# Altium PCB PCB1.PcbDoc
Units mil, origin at the board's own origin, x right, y up, seen from the top; angles counter-clockwise.
Board outline 1970 x 3543.31 mil, 2 copper layers (Top Layer, Bottom Layer); 72 components, 43 nets, 232 pads, 155 vias.
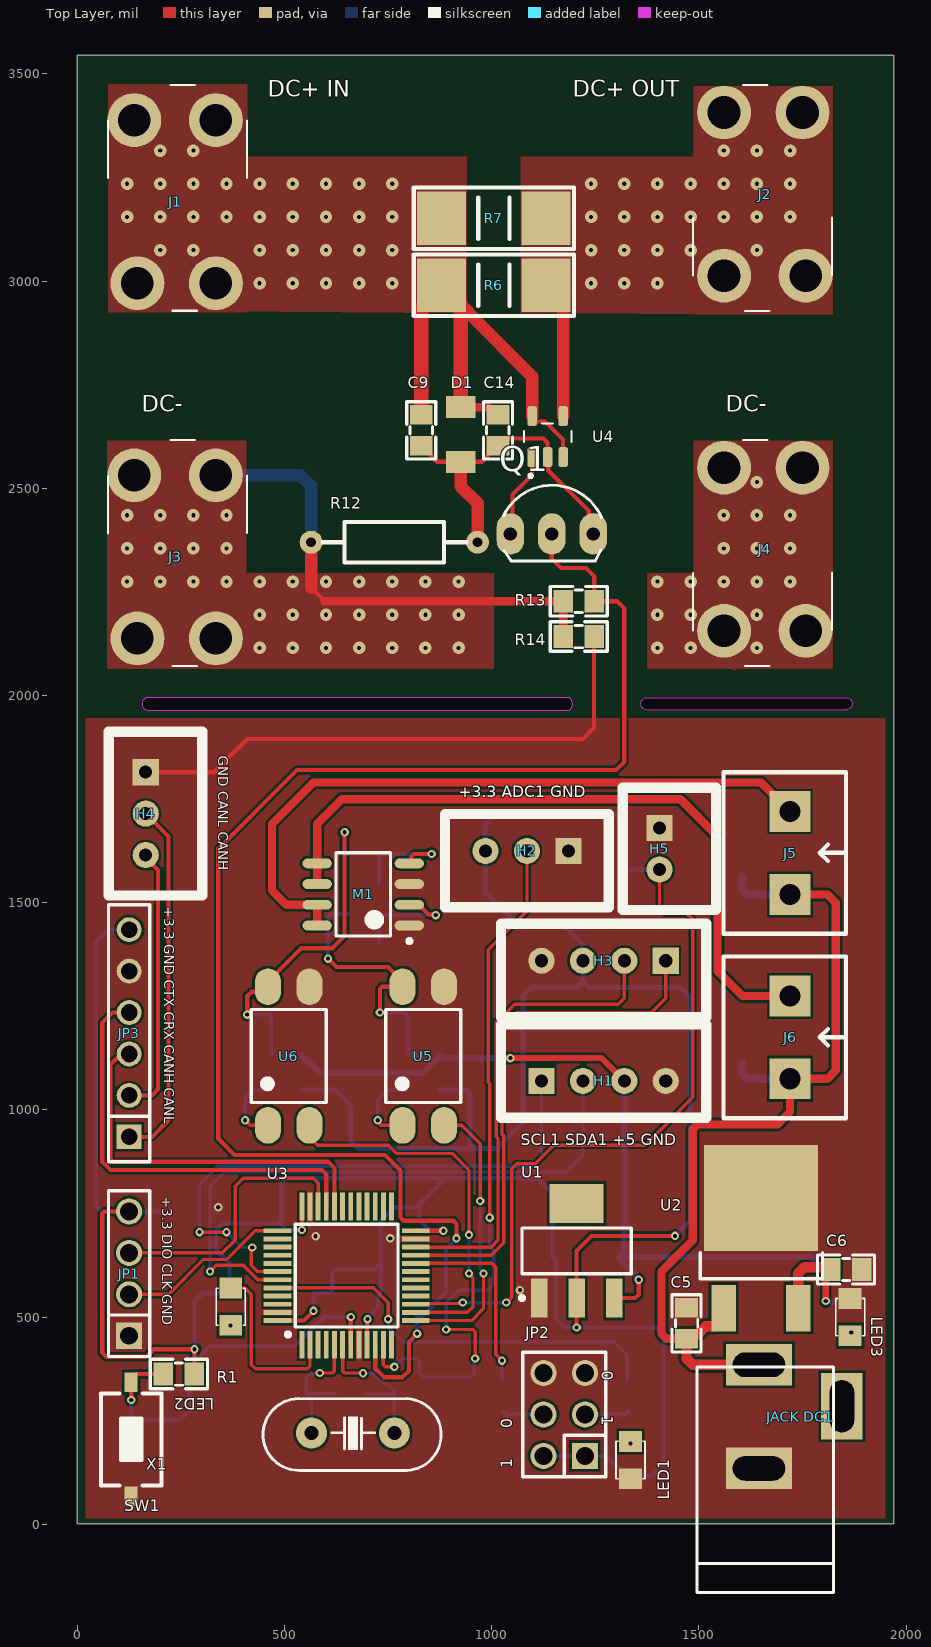
[diagram p0: Top Layer view]
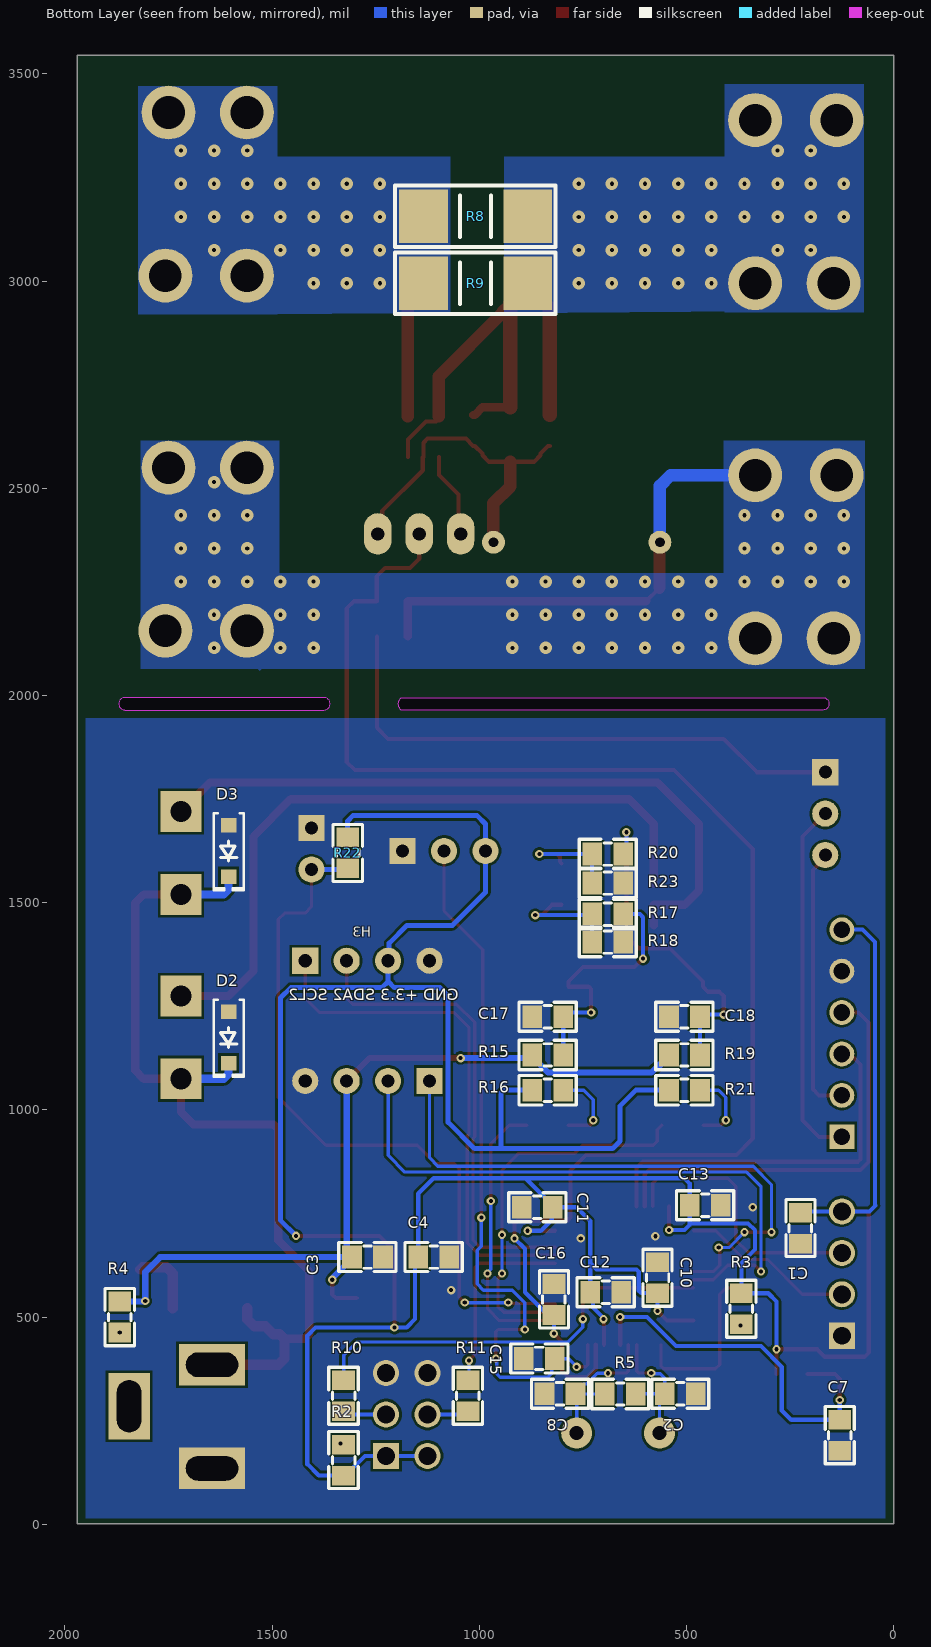
[diagram p1: Bottom Layer view, seen from below]
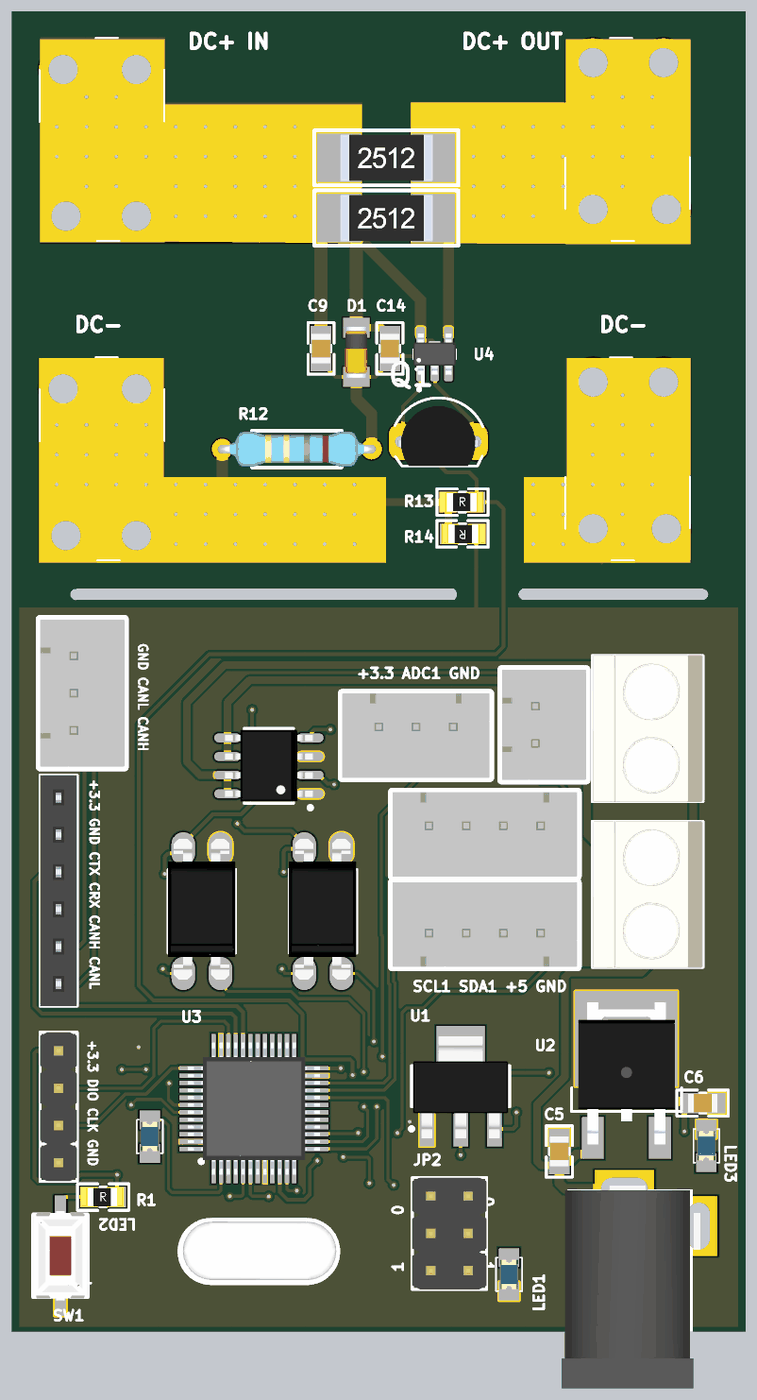
[diagram p2: 3D render of the assembled board from above, using the file's embedded part models]
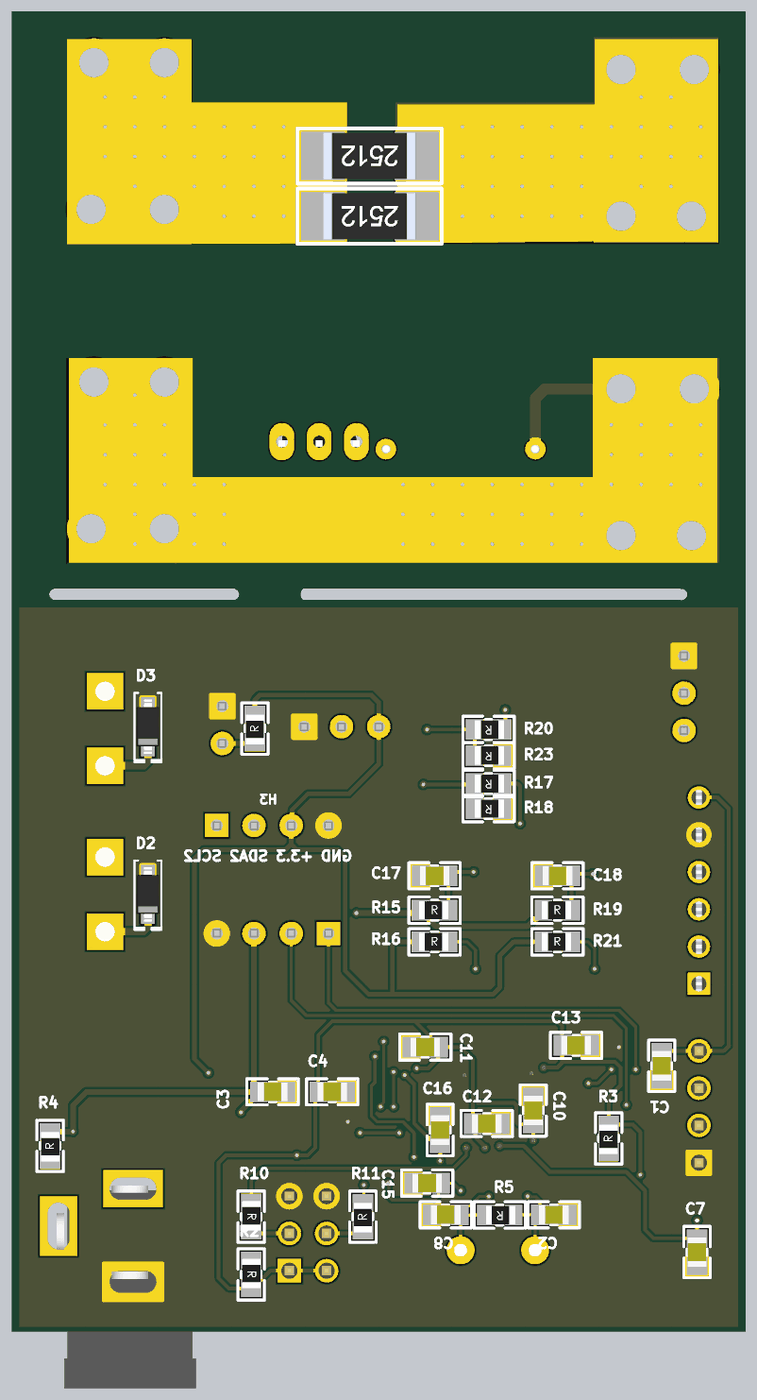
[diagram p3: 3D render of the assembled board from below, using the file's embedded part models]

## Layer stack, top to bottom
Top Solder: solder mask 0.4, Solder Resist, Dk 3.5
Top Layer: signal copper 1.4
Dielectric 1: dielectric 12.6, FR-4, Dk 4.8
Bottom Layer: signal copper 1.4
Bottom Solder: solder mask 0.4, Solder Resist, Dk 3.5

## Board outline
0,1.69 0,3545 1970,3545 1970,1.69
cut-out: 1375,1964.99 cw(c1375,1980) 1375,1995.01 1855,1995.01 cw(c1855,1980) 1870.02,1980 cw(c1855,1980) 1855,1964.99
cut-out: 175,1965 1188.07,1965 ccw(c1175.3,1980) 1195,1980 ccw(c1175.31,1980) 1188.07,1995 167.97,1995 ccw(c171.49,1980)

## Design rules (kind name [scope] priority, off if disabled: settings)
Clearance [All] p1: gap=6 ignorepadtopadclearanceinfootprint=FALSE
HoleSize [All] p1: absolutevalues=TRUE maxlimit=196.85 minlimit=7.99 maxpercent=80.000 minpercent=20.000
MinimumSolderMaskSliver [All] p1 off: minsoldermaskwidth=10
PlaneConnect [All] p1: planeconnectstyle=Direct reliefexpansion=20 reliefentries=4 reliefconductorwidth=10 reliefairgap=10
PolygonConnect [All] p1: connectstyle=Direct reliefconductorwidth=10 reliefentries=4 polygonreliefangle="90 Angle" airgapwidth=10
RoutingVias [All] p1: holewidth=28 width=50 viastyle="Through Hole" minholewidth=10 minwidth=20 maxholewidth=196.85 maxwidth=196.85
SilkToSilkClearance [All] p1 off: silktosilkclearance=10
SilkToSolderMaskClearance [IsPad] p1 off: minsilkscreentomaskgap=10 clearancetoexposedcopper=TRUE
SolderMaskExpansion [All] p1: expansion=4 istentingtop=FALSE
Width [All] p1: maxlimit=393.7 minlimit=8 preferedwidth=10
25 further rules are at their usual default settings.

## Components (designator, comment, footprint, x,y, rotation, side; value= is the part's Value field where it differs from the comment)
C1 "20p" "tu 0805" 225,715 r270 bottom
C2 "20p" "tu 0805" 515,315 r180 bottom
C3 "1uF" "tu 0805" 1270,645 r180 bottom
C4 "1uF" "tu 0805" 1110,645 r180 bottom
C5 "1uF" "tu 0805" 1470,485 r90 top
C6 "1uF" "tu 0805" 1855,615 r0 top
C7 "20p" "tu 0805" 130,215 r270 bottom
C8 "20p" "tu 0805" 805,315 r0 bottom
C9 "20p" "tu 0805" 830,2640 r270 top
C10 "20p" "tu 0805" 570,595 r90 bottom
C11 "20p" "tu 0805" 860,765 r0 bottom
C12 "20p" "tu 0805" 695,560 r180 bottom
C13 "20p" "tu 0805" 455,770 r180 bottom
C14 "20p" "tu 0805" 1015,2640 r270 top
C15 "20p" "tu 0805" 855,400 r0 bottom
C16 "20p" "tu 0805" 819.87,542.57 r270 bottom
C17 "20p" "tu 0805" 835,1225 r180 bottom
C18 "20p" "tu 0805" 505,1225 r180 bottom
D1 "12V" "DIODE ZENNER SMD SOD80" 925,2630 r270 top
D2 "S4" "DIODE SOD-123" 1605,1175 r270 bottom
D3 "S4" "DIODE SOD-123" 1605,1625 r270 bottom
H1 "Header 4P 2.54 Duc Thang" XH2.54M-4 1120,1070 r0 top
H2 "Header 3P 2.54 Duc Thang" XH2.54M-3 1185,1625 r180 top
H3 "Header 4P 2.54 Duc Thang" XH2.54M-4 1420,1360 r180 top
H4 "Header 3P 2.54 Duc Thang" XH2.54M-3 165,1815 r270 top
H5 "Header 2P 2.54 Duc Thang" XH2.54M-2 1405,1680 r270 top
J1 "7768-3" KEYSTONE_7768-3 240,3215 r180 top
J2 "7768-3" KEYSTONE_7768-3 1655,3187.12 r0 top
J3 "7768-3" KEYSTONE_7768-3 240,2357.88 r180 top
J4 "7768-3" KEYSTONE_7768-3 1655,2330 r0 top
J5 "KF2" KF2-5.08 1720,1620 r270 top
J6 "KF2" KF2-5.08 1720,1175 r270 top
"JACK DC1" "JACK DC 5.5" "JACK DC 5.5" 1745,260 r90 top value="Jac DC"
JP1 "JP 1x4 2.54" "JP 1x4 DT" 125,455 r90 top
JP2 "JP 2x3 2.54" "JP 2x3 DT" 1175,265 r90 top
JP3 "JP 1x6 2.54" "JP 1x6 CT" 125,935 r90 top
LED1 "LED-Blue" LED-0805-Blue 1335,200 r270 top value=Blue
LED2 "LED-Blue" LED-0805-Blue 370,480 r90 top value=Blue
LED3 "LED-Blue" LED-0805-Blue 1865,455 r90 top value=Blue
M1 "AO 4828" "SOp 8" 690,1520 r180 top
Q1 "A1015" TO92 1145,2390 r0 top
R1 "10k" "tro smd 0805" 245,365 r0 top
R2 "1K" "tro smd 0805" 1325,155 r270 bottom
R3 "1K" "tro smd 0805" 370,520 r90 bottom
R4 "1K" "tro smd 0805" 1870,500 r90 bottom
R5 "1M" "tro smd 0805" 659.9,312 r0 bottom
R6 "0.01R" "tro smd 2512" 1005,2990 r0 top
R7 "0.01R" "tro smd 2512" 1005,3151.67 r0 top
R8 "0.01R" "tro smd 2512" 1009,3156.67 r0 bottom
R9 "0.01R" "tro smd 2512" 1009,2995 r0 bottom
R10 "10k" "tro smd 0805" 1325,310 r270 bottom
R11 "10k" "tro smd 0805" 1030,310 r90 bottom
R12 "200K" "tro vach 1/4w" 765,2370 r0 top
R13 "50K" "tro smd 0805" 1210,2230 r0 top
R14 "0R" "tro smd 0805" 1210,2140 r180 top
R15 "10k" "tro smd 0805" 835,1135 r180 bottom
R16 "1k" "tro smd 0805" 835,1050 r180 bottom
R17 "1k" "tro smd 0805" 690,1470 r0 bottom
R18 "10k" "tro smd 0805" 690,1402.61 r0 bottom
R19 "10K" "tro smd 0805" 505,1135 r180 bottom
R20 "1k" "tro smd 0805" 690,1615 r0 bottom
R21 "1k" "tro smd 0805" 505,1050 r180 bottom
R22 "10k" "tro smd 0805" 1320,1620 r90 bottom
R23 "10k" "tro smd 0805" 690,1545 r0 bottom
SW1 "SW" SW1-SMD 130,205 r90 top value="SW chip 2 pin"
U1 "LM1117-3.3V" SOT223 1205,660 r0 top
U2 "L7805CDT-TR" DPAK_118_446_112X59_SMD 1645,680 r90 top
U3 "STM32F103C8T6" LQFP-48_19.6_393_58X11_SMD 650,600 r90 top
U4 "INA138NA/3K" SOT95P280X145-5N 1135,2625 r90 top
U5 "OPTO PC817 SMD" SOP4 835,1130 r90 top value=PC817
U6 "OPTO PC817 SMD" SOP4 510,1130 r90 top value=PC817
X1 "8Mhz" XT2 665,220 r180 top value=4Mhz

## Footprints (in the part's own frame and the unit in brackets; to place one, negate y for a bottom-side part, rotate by r counter-clockwise, add the part's x,y. Pads: shape width x height; smd on the part's side, far side on the other; paste and mask are expansions set on the pad)
"DIODE SOD-123" [mm] "SOD-123"
  rect 0.9x0.95 smd: 1(-1.575,0) 2(1.575,0)
  silkscreen extent -2.3,-0.92 2.41,0.92, body extent -1.86,-0.78 1.86,0.77, height 1.35
"DIODE ZENNER SMD SOD80" [mm] "SOD80"
  rect 1.35x1.8 smd: 1(1.675,0) 2(-1.675,0)
  body extent -1.75,-0.76 1.75,0.74, height 1.45
DPAK_118_446_112X59_SMD [mm] "CASE: DPAK"
  rect 2.85x1.5 smd: 1(-4.023,2.163) 3(-4.023,-2.417)
  rect 6.5x7 smd: 2(2.727,-0.127)
  silkscreen extent -2.22,-3.9 -0.62,3.6, body extent -4.47,-3.43 5.23,3.15, height 2.3
"JACK DC 5.5" [mil] "Jac DC input"
  rect 100x160 hole 59.06 slot 125.98 at 90 deg: 1(125,100) 2(-125,100)
  rect 160x100 hole 59.06 slot 125.98 at 0 deg: 3(25,-100)
  silkscreen extent -425,-80 120,250, body extent -410,-105 134,269, height 434
"JP 1x4 DT" [mm] "4 pins, 1 row, straight, gold plating"
  rect 1.6x1.6 hole 1.1: 1(0,0)
  round 1.6 hole 1.1: 2(2.54,0) 3(5.08,0) 4(7.62,0)
  silkscreen extent -1.27,-1.27 8.89,1.27, body extent -1.27,-1.27 8.89,1.27, height 8.54
"JP 1x6 CT" [mm] "6 row, straight, gold plating"
  rect 1.52x1.52 hole 1.02: 1(0,0)
  round 1.52 hole 1.02: 2(2.54,0) 3(5.08,0) 4(7.62,0) 5(10.16,0) 6(12.7,0)
  silkscreen extent -1.52,-1.27 14.22,1.27, body extent -1.52,-1.25 14.22,1.25, height 8.51
"JP 2x3 DT" [mm]
  rect 1.6x1.6 hole 1.1: 1(-2.54,-1.27)
  round 1.6 hole 1.1: 2(0,-1.27) 3(2.54,-1.27) 4(2.54,1.27) 5(0,1.27) 6(-2.54,1.27)
  silkscreen extent -3.81,-2.54 3.81,2.54, body extent -3.81,-2.54 3.81,2.54, height 8.55
KEYSTONE_7768-3 [mil]
  round 130 hole 78.74: 1(-94.29,220) 1(-94.29,-173.7) 1(95,220) 1(102.56,-173.7)
  silkscreen extent -169,-259 166,286
KF2-5.08 [mm]
  rect 2.5x2.5 hole 1.3: 1(-2.54,0) 2(2.54,0)
  silkscreen extent -4.95,-4.08 4.95,3.43, body extent -5,-4.07 5,3.43, height 10
LED-0805-Blue [mil]
  rect 50x55 smd: 1(0,0) 2(90,0)
  silkscreen extent 0,-35 90,35, body extent 5,-25 85,25, height 43
LQFP-48_19.6_393_58X11_SMD [mm] "48LQFP"
  rect 1.7x0.3 smd mask+0.076: 1(-4.238,2.75) 2(-4.238,2.25) 3(-4.238,1.75) 4(-4.238,1.25) 5(-4.238,0.75) 6(-4.238,0.25) 7(-4.238,-0.25) 8(-4.238,-0.75) 9(-4.238,-1.25) 10(-4.238,-1.75) 11(-4.238,-2.25) 12(-4.238,-2.75) 25(4.238,-2.75) 26(4.238,-2.25) 27(4.238,-1.75) 28(4.238,-1.25) 29(4.238,-0.75) 30(4.238,-0.25) 31(4.238,0.25) 32(4.238,0.75) 33(4.238,1.25) 34(4.238,1.75) 35(4.238,2.25) 36(4.238,2.75)
  rect 0.3x1.7 smd mask+0.076: 13(-2.75,-4.238) 14(-2.25,-4.238) 15(-1.75,-4.238) 16(-1.25,-4.238) 17(-0.75,-4.238) 18(-0.25,-4.238) 19(0.25,-4.238) 20(0.75,-4.238) 21(1.25,-4.238) 22(1.75,-4.238) 23(2.25,-4.238) 24(2.75,-4.238) 37(2.75,4.238) 38(2.25,4.238) 39(1.75,4.238) 40(1.25,4.238) 41(0.75,4.238) 42(0.25,4.238) 43(-0.25,4.238) 44(-0.75,4.238) 45(-1.25,4.238) 46(-1.75,4.238) 47(-2.25,4.238) 48(-2.75,4.238)
  silkscreen extent -3.72,-3.15 3.15,3.72, body extent -4.5,-4.5 4.5,4.5, height 1.7
SOP4 [mm]
  oval 2.25x1.6 smd: 1(-4.25,1.27) 2(-4.25,-1.27) 3(4.25,-1.27) 4(4.25,1.27)
  silkscreen extent -2.85,-2.3 2.85,2.3, body extent -4.67,-2.29 4.93,2.31, height 3.6
"SOp 8" [mm] "SOIC, 8-Leads, Body 4.9x3.9mm, Pitch 1.27mm, IPC High Density"
  oval 1.8x0.6 smd: 1(-2.825,1.905) 2(-2.825,0.635) 3(-2.825,-0.635) 4(-2.825,-1.905) 5(2.825,-1.905) 6(2.825,-0.635) 7(2.825,0.635) 8(2.825,1.905)
  silkscreen extent -2.95,-2.55 1.68,2.98, body extent -2.99,-2.45 3,2.45, height 1.6
SOT95P280X145-5N [mm]
  rrect50% 1.21x0.59 smd: 1(-1.255,0.95) 2(-1.255,0) 3(-1.255,-0.95) 4(1.255,-0.95) 5(1.255,0.95)
  silkscreen extent -2.51,-1.45 0.8,1.45, body extent -1.4,-1.45 1.4,1.45, height 1.45
SOT223 [mm]
  rect 1x2.4 smd: 1(-2.3,-2.9) 2(0,-2.9) 3(2.3,-2.9)
  rect 3.3x2.4 smd: 4(0,2.9)
  silkscreen extent -3.47,-3.02 3.35,1.4, body extent -3.25,-3.56 3.25,3.4, height 1.68
SW1-SMD [mm]
  rect 1.2x0.8 smd: 1(-3.5,0) 2(3.5,0)
  silkscreen extent -2.82,-1.85 2.82,1.85, body extent -3.05,-1.85 3.05,1.85, height 2.5
TO92 [mil] "TO-92"
  oval 66x100 hole 32: 1(-100,0) 2(0,0) 3(100,0)
  silkscreen extent -117,-65 120,118, body extent -109,-66 109,95, height 245
"tro smd 0805" [mm]
  rect 1.2x1.4 smd: 1(-0.946,-0.061) 2(0.954,-0.061)
  silkscreen extent -1.75,-0.97 1.75,0.84, body extent -1.56,-0.76 1.44,0.64, height 0.53
"tro smd 2512" [mm]
  rect 3x3.3 smd: 1(-3.2,0) 2(3.2,0)
  silkscreen extent -4.9,-1.88 4.93,1.88, body extent -3.12,-1.57 3.18,1.58, height 0.82
"tro vach 1/4w" [mm]
  round 1.4 hole 0.6: 1(-5.1,0) 2(5.1,0)
  silkscreen extent -4.39,-1.25 4.42,1.25, body extent -5.38,-1.2 5.38,1.2, height 2.41
"tu 0805" [mm] "Compoment SMD 80x50mil"
  rect 1.2x1.4 smd: 1(-0.946,-0.003) 2(0.954,-0.003)
  silkscreen extent -1.75,-0.89 1.75,0.89, body extent -1.01,-0.64 1.01,0.63, height 0.61
XH2.54M-2 [mm]
  rect 1.6x1.6 hole 0.8: 1(0,0)
  round 1.6 hole 0.8: 2(2.54,0)
  silkscreen extent -2.48,-2.26 5.02,3.46, body extent -2.48,-2.26 5.02,3.48, height 6.91
XH2.54M-3 [mm]
  rect 1.6x1.6 hole 0.8: 1(0,0)
  round 1.6 hole 0.8: 2(2.54,0) 3(5.08,0)
  silkscreen extent -2.48,-2.26 7.56,3.46, body extent -2.48,-2.26 7.56,3.48, height 6.91
XH2.54M-4 [mm]
  rect 1.6x1.6 hole 0.8: 1(0,0)
  round 1.6 hole 0.8: 2(2.54,0) 3(5.08,0) 4(7.62,0)
  silkscreen extent -2.48,-2.26 10.1,3.46, body extent -2.48,-2.26 10.1,3.48, height 6.91
XT2 [mil] "Footpin for Crystal 2 pin"
  round 75 hole 34: 1(-100,0) 2(100,0)
  silkscreen extent -213,-83 217,90, body extent -216,-87 216,90, height 144

## Part data
C1 C2 C3 C4 C5 C6 C7 C8 C9 C10 C11 C12 C13 C14 C15 C16 C17 C18: library part "Tu 0805 474 50V 10%", "Dán", Chung_Loai=Dán, Don_Vi=Con, Ma_Hang=MH006116, So_Chan=2, Ten_Linh_Kien="Tụ 0805 474-470nF 50V 10%"
D1: library part "Diode Zener 12V", "Dán", Chung_Loai=Dán, Don_Vi=Con, Ma_Hang=MH000945, Ten_Linh_Kien="Diode Zener 1/2W 12V SMD1206 ZMM12"
D2 D3: library part "Diode S4", "Dán", Chung_Loai=Dán, Don_Vi=Con, Ma_Hang=MH005519, Ten_Linh_Kien="Diode S4 SOD123 ( 1N5819 SOD123)"
H1 H2 H3 H4 H5: "Cắm", Chung_Loai=Cắm, Don_Vi=Con
  H1 H3: Ma_Hang=MH001285, Ten_Linh_Kien="Header 4P XH2.54-4P Đực Thẳng"
  H2 H4: Ma_Hang=MH001292, Ten_Linh_Kien="Header 3P XH2.54-3P Đực Thẳng"
  H5: Ma_Hang=MH001283, Ten_Linh_Kien="Header 2P XH2.54-2P Đực Thẳng"
J1 J2 J3 J4: Package=None, Availability=Unavailable, MP=7768-3, Price=None
J5 J6: Manufacturer="Würth Elektronik eiSos GmbH", partNo=691103110002, ComponentLink1 Description=Manufacturer, ComponentLink1URL=http://www.we-online.com, ComponentLink2 Description=Datasheet, ComponentLink2URL=http://katalog.we-online.de/em/datasheet/6911031100xx.pdf, Created by="Karrer Zheng", Created Date="29 October 2013", NoPins=2
JP1: library part "JP 1x4 2.54 Duc Thang", "Cắm", Chung_Loai=Cắm, Don_Vi=Con, Ma_Hang=MH000903, Ten_Linh_Kien="Jump Đơn Đực 2.54MM 1x40P Thẳng 11MM"
JP2: library part "JP 2x3 2.54 Duc Thang", "Cắm", Chung_Loai=Cắm, Don_Vi=Con, Ma_Hang=MH002686, Ten_Linh_Kien="Jump Đôi Đực 2.54MM 2x40P Thẳng 11MM"
JP3: library part "JP 1x6 2.54 Cai Thang", "Cắm", Chung_Loai=Cắm, Don_Vi=Con, Ma_Hang=MH004006, Ten_Linh_Kien="Jump Đơn Cái 2.54MM 1x20P Thẳng"
LED1 LED2 LED3: "LED Blue 10mA 2.2v", ComponentLink1Description=Datasheet, ComponentLink1URL="D:\Dropbox\Datasheets\Opto and Illumination\LEDs\SMD LED.pdf", Unit Price=0.0476
M1: library part "APM 4828 SMD", "Dán", Chung_Loai=Dán, Don_Vi=Con, Ma_Hang=MH005678, Ten_Linh_Kien="AO4828 SOP8 MOSFET N-2CH 4.5A 60V"
Q1: "PNP 600mW, ECB"
R1 R2 R3 R4 R5 R10 R11 R13 R14 R15 R16 R17 R18 R19 R20 R21 R22 R23: library part "Tro 0805 1% 33k", "Dán", Chung_Loai=Dán, Don_Vi=Con, Ma_Hang=MH005478, So_Chan=2, Ten_Linh_Kien="Trở 0805 1% 33k"
R6 R7 R8 R9: library part "Tro 2512 1% 0.01R", "Dán", Chung_Loai=Dán, Don_Vi=Con, Ma_Hang=MH004912, So_Chan=2, Ten_Linh_Kien="Trở 2512 1% R010-0.01R 1W"
R12: library part "Tro Vach 1/4W 5% 1.2M", "Cắm", Chung_Loai=Cắm, Don_Vi=Con, Ma_Hang=MH007349, So_Chan=2, Ten_Linh_Kien="Trở Vạch 1/4w 5% 1.2M"
SW1: library part SW2, "Switch button 2 pin"
U1: library part LM1117, "800mA Low-Dropout Linear Regulator", Creator="Nguyen Ba Bien", Website=http://group3i.net
U2: library part REG_35V_5V-1.5A-7.5W-DPAK, "Linear Voltage Regulator IC 1 Output 1.5A DPAK", Alternate Part Number-1="CJ7805 3%", Case/Package=DPAK, Manufacturer=Diodes, Manufacturer Part Number=L7805CDT-TR, Supplier Part Number-1=L7805CDT-TR, Supplier-1="SP ROAD"
U3: library part IC_STM32F103C8T6, "ARM® Cortex®-M3 STM32F1 Microcontroller IC 32-Bit 72MHz 64KB (64K x 8) FLASH 48-LQFP (7x7)", Alternate Part Number-1=NA, Case/Package=LQFP48, Manufacturer=STMicroelectronics, Manufacturer Part Number=STM32F103C8T6, Supplier Part Number-1=STM32F103C8T6, Supplier-1=LCSC
U4: "2.7 to 36V, 800kHz Variable gain current sense amplifier 5-SOT-23 -40 to 125", Package="SOT-23-5 Texas Instruments", Arrow_Electronics-Purchase-URL=https://snapeda.com/shop?store=Arrow+Electronics&id=11314, Availability=Good, DigiKey-Purchase-URL=https://snapeda.com/shop?store=DigiKey&id=11314, MF="Texas Instruments", Mouser-Purchase-URL=https://snapeda.com/shop?store=Mouser&id=11314, MP=INA138NA/3K, Price=None, SnapEDA_Link=https://www.snapeda.com/parts/INA138NA/3K/Texas%20Instruments/view-part/11314/?ref=snap, Texas_Instruments-Purchase-URL=https://snapeda.com/shop?store=Texas+Instruments&id=11314
U5 U6: "Single Opto"
X1: library part XT2, "Crystal, 32.768 KHz, -40 to 85 degC, 3.2 x 1.5 x 0.9 mm SMD"

## Via types
v1: diameter 30, hole 10, Top Layer to Bottom Layer, tented both sides, 108 vias
v2: diameter 20, hole 10, Top Layer to Bottom Layer, tented both sides, 47 vias

## Nets (pads, with @x,y where several pads share a name; then routed paths per layer and width w, separated by ;. In a path a pad name is that pad's centre, name@x,y a point inside that pad or via, vN(x,y) a via of type N, cw(c..) or ccw(c..) an arc to the next point about the centre after c; other vN are vias at no path point)
+3.3: C1.1 C4.1 C10.1 C11.1 C12.1 C13.1 H2.3 H3.3 JP1.4 JP2.1 JP2.6 JP3.6 R1.2 R2.2 R3.2 R16.1 R21.1 R22.2 U1.2 U3.9 U3.24 U3.36 U3.48 | length 8861.8
  Top Layer w10: JP1.4 65.86,755 60,749.14 60,415 70.86,404.14 166.22,404.14 184.5,422.43 v2(282.57,422.43) R1.2 ; U3.48 546.73,491.73 v2(570,515) ; v2(541.73,710) U3.36 ; U3.9 699.21,494.21 v2(700,495) ; U3.24 v2(883.27,708.27) ; v2(1205,475) U1.2 1205,660 1241.02,696.02 v2(1442.46,696.02)
  Bottom Layer w10: JP3.6 75,1435 45,1405 45,770 44.14,769.14 58.28,755 JP1.4 222.36,755 C1.1 ; v2(282.57,422.43) 282.57,537.57 302.57,557.57 R3.2 367.61,630.64 335,663.25 335,709.7 351.3,726 492.23,726 ; v2(541.73,710) 505,710 492.23,722.77 C13.1 492.23,822.23 505,835 888.7,835 ; v2(570,515) 570,557.64 C10.1 609.14,557.77 615,563.63 615,609.14 620.86,615 717.23,615 732.23,630 ; v2(700,495) 700,497.71 725.46,523.16 725.46,553.1 C12.1 732.23,630 ; C11.1@822.77,769.07 888.7,835 ; v2(883.27,708.27) 851.73,708.27 825,735 825,762.91 C11.1 765.13,765.13 732.23,732.23 732.23,630 ; JP2.6 JP2.1 1275.88,165 1323.46,117.43 R2.2 1387.43,117.43 1415,145 1415,455 1395,475 v2(1205,475) 1175,475 1155,495 1155,637.09 C4.1 1147.23,797.77 1110,835 888.7,835
  Bottom Layer w12: R21.1 622.39,1047.61 660,1010 660,925 677.94,907.06 947.94,907.06 ; R16.1 942.08,1047.61 947.94,1041.75 947.94,907.06 ; R22.2 1317.61,1697.39 1305,1710 1005,1710 985,1690 H2.3 985,1525 1065,1445 1175,1445 1217.53,1402.47 1217.53,1362.47 H3.3 1220,1310 ; v2(1442.46,696.02) 1480,733.56 1480,1270 1455,1295 1235,1295 1220,1310 ; 947.94,907.06 1012.06,907.06 1075,970 1075,1275 1095,1295 1205,1295 1220,1310
+5: C3.1 C6.1 H1.3 R4.2 R15.1 R19.1 U1.3 U2.3 | length 2339.2
  Top Layer w10: U1.3 1345.83,545.83 1355,555 v2(1355,590) ; C6.1@1806.21,603.31 C6.1
  Top Layer w15: v2(1045,1125) 1265,1125 H1.3 ; v2(1806.21,538.79) C6.1@1806.21,603.31
  Top Layer w25: U2.3 1740.16,605.36 1754.8,620 1812.64,620 C6.1
  Bottom Layer w15: R19.1 542.23,1128.67 561.85,1109.05 565.79,1109.05 584.83,1090 833.56,1090 872.23,1128.67 R15.1 879.83,1125 v2(1045,1125) ; H1.3 1320,653.7 C3.1@1311.17,644.87 ; v2(1355,590) 1353.09,591.91 1353.09,595.07 1307.23,640.93 C3.1@1311.17,644.87 ; R4.2 1807.43,537.57 v2(1806.21,538.79) 1806.21,608.79 1770.13,644.87 C3.1@1311.17,644.87
+12: "JACK DC1.1" C5.1 D2.2 D3.2 J5.2 J6.2 U2.1 | length 2225.9
  Top Layer w20: C5.1 1421.72,447.77 1410,459.49 1410,610 1485,685 1485,953.28 1496.72,965 1690,965 1720,995 J6.2 1810,1075 1830,1095 1830,1500 1819.97,1510.03 1810,1520 J5.2
  Top Layer w25: U2.1 1559.84,495.04 1542.81,478.01 1516.24,478.01 1497.12,458.89 1481.26,458.89 C5.1 1470.13,399.87 1485,385 1645,385
  Bottom Layer w20: D2.2 1605,1086.72 1616.72,1075 J6.2 ; D3.2 1605,1531.72 1616.72,1520 J5.2
  Bottom Layer w30: 1644.87,385.13 1645,385
ADC0: C16.2 Q1.2 R13.2 U3.10 | length 3764.2
  Top Layer w10: U3.10 718.9,376.1 740,355 785,355 800,370 800,440 v2(820,460) ; v2(915,690) 915,725 907.5,732.5 787.5,732.5 780,740 780,853.59 742.59,891 379.54,891 340,930.54 340,1630 530,1820 1300,1820 1320,1840 1320,2210 1302.39,2227.61 R13.2 1247.57,2287.43 1227.07,2307.93 1167.07,2307.93 1145,2330 Q1.2
  Bottom Layer w10: v2(820,460) C16.2 C16.2@827.5,497.5 ; C16.2@835,490 C16.2@827.5,497.5 ; v2(915,690) 890,665 890,560 C16.2@827.5,497.5
ADC1: C15.1 H2.2 U3.11 | length 1778.9
  Top Layer w8: U3.11 738.58,384.58 743.27,379.9 749.9,379.9 750,380 v2(765,380) ; v2(890,470) 955,470 960,465 v2(960,400) ; v2(995,740) 995,1063.62 992,1066.62 992,1387 1085,1480 H2.2
  Bottom Layer w8: v2(765,380) 784.62,399.62 C15.1@817.77,399.62 ; C15.1 825,392.91 825,365 835,355 950,355 958,363 958,398 v2(960,400) ; v2(890,470) 890,535 920,565 990,565 1005,580 1005,660.88 995,670.88 v2(995,740)
Boot0: R10.1 U3.44 | length 1007.2
  Top Layer w8: U3.44 714.53,570.47 750,535 v2(750,495)
  Bottom Layer w8: v2(750,495) 750,475 785,440 1295,440 1327.39,407.61 R10.1
Boot1: R11.2 U3.20 | length 477
  Top Layer w8: U3.20 817.09,629.76 1000.24,629.76 1010,620 1010,410 v2(1025,395)
  Bottom Layer w8: v2(1025,395) 1025,350.18 R11.2
Button: H5.2 R22.1 U3.15 | length 1757.4
  Top Layer w8: U3.15 818.76,533.01 928.01,533.01 v2(930,535) ; v2(1035,535) 1048,548 1048,858 1060,870 1105,870 1150,915 1370,915 1485,1030 1485,1460 1470,1475 1420,1475 1405,1490 H5.2
  Bottom Layer w8: v2(930,535) v2(1035,535)
  Bottom Layer w12: R22.1 1320.38,1580 H5.2
CAN_RX: JP3.3 U3.32 | length 926.5
  Top Layer w10: JP3.3 115.46,1125.46 95.46,1125.46 80,1110 80,880.86 85.86,875 605,875 620.47,859.53 U3.32
CAN_TX: JP3.4 U3.33 | length 1041.2
  Top Layer w10: JP3.4 85,1235 60,1210 60,875 80,855 589.93,855 600.79,844.14 U3.33
CANH: H4.3 JP3.2 | length 653.6
  Top Layer w10: JP3.2 180,1035 195,1050 195,1579.24 165,1609.24 H4.3
CANL: H4.2 JP3.1 | length 874.4
  Top Layer w10: JP3.1 180,935 220,975 220,1660 H4.2
D1: J5.1 M1.7 M1.8 | length 1653.8
  Top Layer w20: M1.8 M1.7 504.79,1495 470,1529.79 470,1690 570,1790 1650,1790 J5.1
D2: J6.1 M1.5 M1.6 | length 1698.3
  Top Layer w20: M1.6 M1.5 578.78,1690.21 638.57,1750 1455,1750 1545,1660 1545,1335 1605,1275 J6.1
DC+: C9.1 C14.1 D1.2 J1.1 R6.1 R7.1 R8.1 R9.1 U4.3 U4.5 | length 1295.2
  Top Layer w10: U4.5 1097.6,2667.95 1104.15,2661.4 1128.6,2661.4 1172.4,2617.6 U4.3
  Top Layer w20: R6.1@829.87,2934.95 879.02,2984.09 R6.1 ; D1.2 992.21,2695.94 1010.93,2677.23 C14.1 ; 945,2922.62 945,2924.02
  Top Layer w30: R6.1 879.02,2988.07 923.07,2944.02 925,2944.02 945,2924.02 ; 945,2922.62 1097.6,2770.02 U4.5
  Top Layer w35: C9.1 R6.1@829.87,2934.95 ; R6.1 902.95,2966.06 925,2944.02 D1.2
  other v1: 440,2995 520,2995 600,2995 680,2995 760,2995 200,3075 280,3075 440,3075 520,3075 600,3075 680,3075 760,3075 120,3155 200,3155 280,3155 360,3155 440,3155 520,3155 600,3155 680,3155 760,3155 120,3235 200,3235 280,3235 360,3235 440,3235 520,3235 600,3235 680,3235 760,3235 200,3315 280,3315
DC+_OUT: J2.1 R6.2 R7.2 R8.2 R9.2 U4.4 | length 332.7
  Top Layer w20: R6.2 R6.2@1172.4,2948.58
  Top Layer w30: U4.4 R6.2@1172.4,2948.58
  other v1: 1240,2995 1320,2995 1400,2995 1240,3075 1320,3075 1400,3075 1480,3075 1640,3075 1240,3155 1320,3155 1400,3155 1480,3155 1560,3155 1640,3155 1720,3155 1240,3235 1320,3235 1400,3235 1480,3235 1560,3235 1640,3235 1720,3235 1560,3315 1640,3315 1720,3315
DC-: J3.1 J4.1 R12.1 R13.1 R14.2 | length 1193.3
  Top Layer w10: R12.1 R12.1@565,2369.21 ; 565,2260 597.39,2227.61 ; R13.1@1172.43,2227.26 R13.1
  Top Layer w20: 597.39,2227.61 R13.1 ; R14.2 R13.1@1172.43,2227.26
  Top Layer w30: 565,2260 R12.1@565,2369.21
  Bottom Layer w30: J3.1@334.29,2531.58 538.42,2531.58 564.21,2505.79 R12.1
  other v1: 440,2115 520,2115 600,2115 680,2115 760,2115 840,2115 920,2115 1400,2115 1480,2115 1640,2115 440,2195 520,2195 600,2195 680,2195 760,2195 840,2195 920,2195 1400,2195 1480,2195 1640,2195 120,2275 200,2275 280,2275 360,2275 440,2275 520,2275 600,2275 680,2275 760,2275 840,2275 920,2275 1400,2275 1480,2275 1560,2275 1640,2275 1720,2275 120,2355 200,2355 280,2355 360,2355 1560,2355 1640,2355 1720,2355 120,2435 200,2435 280,2435 360,2435 1560,2435 1640,2435 1720,2435 1640,2515
G1: C17.2 R15.2 R17.1 U5.4 | length 644.1
  Top Layer w10: v2(605,1365) 625,1345 750.12,1345 785,1310.12 U5.4 735.86,1297.32 730,1291.46 v2(730,1235)
  Bottom Layer w10: v2(605,1365) 605,1465 612.39,1472.39 R17.1 ; v2(730,1235) 787.29,1235 C17.2 R15.2
G2: C18.2 R19.2 R20.1 U6.4 | length 805.2
  Top Layer w10: v2(410,1230) 410,1275 420,1285 447.68,1285 U6.4 460,1310.12 539.88,1390 615,1390 645,1420 v2(645,1670)
  Bottom Layer w10: v2(410,1230) 462.29,1230 C18.2 R19.2 ; v2(645,1670) 645,1625.17 R20.1
GND: "JACK DC1.2" C1.2 C2.2 C3.2 C4.2 C5.2 C6.2 C7.2 C8.2 C10.2 C11.2 C12.2 C13.2 C15.2 C16.1 C17.1 C18.1 D2.1 D3.1 H1.4 H2.1 H3.4 H4.1 H5.1 JP1.1 JP2.3 JP2.4 JP3.5 LED1.2 LED3.2 M1.1 M1.3 R14.1 R18.1 R23.1 SW1.1 U1.1 U2.2 U3.8 U3.23 U3.35 U3.47 U5.3 U6.3 | length 1346.8
  Top Layer w10: H4.1 330,1815 410,1895 1220,1895 1247.23,1922.23 R14.1
  other v2: 1068,565 755,690 575,695 340,765
I2C1_SCL: H1.1 U3.42 | length 1408.1
  Top Layer w8: v2(295,705) v2(360,705) ; v2(422.05,667.95) 420,665.9 420,625.11 435.27,609.84 U3.42
  Bottom Layer w8: v2(295,705) 295,820 339,864 1100,864 1120,884 H1.1 ; v2(360,705) 397.05,667.95 v2(422.05,667.95)
I2C1_SDA: H1.2 U3.43 | length 1499.9
  Top Layer w8: v2(320,610) 335,625 400.31,625 435.16,590.16 U3.43
  Bottom Layer w8: v2(320,610) 320,815 355,850 1180,850 1220,890 H1.2
I2C2_SCL: H3.1 U3.21 | length 1261.1
  Top Layer w8: U3.21 999.21,649.21 1029,679 1029,937.5 1025,941.5 1025,1200 1060,1235 1385,1235 1420,1270 H3.1
I2C2_SDA: H3.2 U3.22 | length 1155.9
  Top Layer w8: U3.22 998.9,668.9 1015,685 1015,931.7 1011,935.7 1011,1211 1055,1255 1305,1255 1320,1270 H3.2
NetC9_2: C9.2 C14.2 D1.1 Q1.3 R12.2 U4.2 | length 829.5
  Top Layer w10: C9.2 833.8,2602.43 852.43,2583.8 852.43,2579.87 868.24,2564.06 D1.1 976.5,2564.06 992.31,2579.87 992.31,2583.8 1010.93,2602.43 C14.2 1032.44,2620 1125,2620 1135,2610 U4.2 1136.33,2574.26 1136.33,2543.67 1234.28,2445.72 1234.28,2400.72 Q1.3
  Top Layer w30: D1.1 925,2505 965.79,2464.21 R12.2
NetJP2_2: JP2.2 R10.2 | length 105.5
  Bottom Layer w10: JP2.2 1319.97,265 R10.2
NetJP2_5: JP2.5 R11.1 | length 100.6
  Bottom Layer w10: R11.1 1035.38,265 JP2.5
NetLED1_1: LED1.1 R2.1
  other v2: 1335,195
NetLED2_1: LED2.1 R3.1
  other v2: 370,480
NetLED3_1: LED3.1 R4.1
  other v2: 1867.61,462.77
NetQ1_1: Q1.1 U4.1 | length 207.4
  Top Layer w10: Q1.1 1050,2395 1050,2485 1097.6,2532.6 U4.1
NetR16_2: R16.2 U5.1 | length 199.8
  Top Layer w8: v2(725,975) 725,971.75 732.32,964.43 732.32,962.68 U5.1
  Bottom Layer w8: v2(725,975) 725,1025 747.61,1047.61 R16.2
NetR21_2: R21.2 U6.1 | length 184.8
  Top Layer w8: v2(405,975) 417.32,962.68 U6.1
  Bottom Layer w8: v2(405,975) 405,1030 422.61,1047.61 R21.2
NRST: C7.1 R1.1 SW1.2 U3.7 | length 942.1
  Top Layer w10: v2(130,300) SW1.2 130,350.67 141.94,362.61 R1.1 ; U3.7 659.92,433.23 659.92,499.92 v2(660,500)
  Bottom Layer w10: v2(130,300) 130,252.36 C7.1 247.23,252.23 270,275 270,380 320,430 525,430 595,500 v2(660,500)
OSC_IN: C2.1 R5.1 U3.5 X1.2 | length 347
  Top Layer w8: v2(585,365) 615.55,365 620.24,369.69 620.24,432.91 U3.5
  Bottom Layer w8: X1.2 565,302.09 C2.1 ; v2(585,365) 583,363 563,363 552.23,352.23 C2.1 ; R5.1 622.2,314.87 C2.1
OSC_OUT: C8.1 R5.2 U3.6 X1.1 | length 377.5
  Top Layer w8: U3.6 640.16,369.69 644.84,365 689.01,365 v2(689.5,364.5)
  Bottom Layer w8: v2(689.5,364.5) 714.89,364.5 740.7,338.69 748.15,338.69 765,321.84 C8.1@765,314.39 ; R5.2 C8.1@765,314.39 ; X1.1 C8.1@765,314.39
PC13: LED2.2 U3.2 | length 426.3
  Top Layer w8: LED2.2 405,570 420,555 420,385 430,375 555.31,375 561.42,381.1 U3.2
RL1: U3.13 U5.2 | length 681.7
  Top Layer w8: U3.13 951.73,491.73 980,520 v2(980,605) ; U5.2 927.32,962.68 972,918 v2(972,780)
  Bottom Layer w8: v2(972,780) 972,615.69 980,607.69 v2(980,605)
RL2: U3.14 U6.2 | length 924.1
  Top Layer w8: U6.2 570.32,952.36 570.32,924.69 575,920 575,919.37 579.69,914.68 750.32,914.68 770,895 905,895 945,855 v2(945,698.41) ; U3.14 941.42,511.42 955,525 955,594.31 945,604.31 v2(945,605)
  Bottom Layer w8: v2(945,605) v2(945,698.41)
SWCLK: JP1.2 U3.37 | length 421.6
  Top Layer w8: JP1.2 220,555 304,639 360.44,639 429.71,708.27 U3.37
SWDIO: JP1.3 U3.34 | length 668
  Top Layer w8: JP1.3 350,655 381,686 381,816 400,835 569.14,835 581.1,823.04 U3.34
Vg1: M1.2 R17.2 R18.2 | length 279.9
  Top Layer w10: M1.2 824.84,1495 847.93,1471.91 863.09,1471.91 v2(865,1470)
  Bottom Layer w10: R18.2 R17.2 729.97,1470 v2(865,1470)
Vg2: M1.4 R20.2 R23.2 | length 267.1
  Top Layer w10: M1.4 805,1598.78 805,1610 812.39,1617.39 v2(855,1617.39)
  Bottom Layer w10: R23.2 R20.2 v2(855,1617.39)
pads on no net: "JACK DC1.3" U1.4 U3.1 U3.3 U3.4 U3.12 U3.16 U3.17 U3.18 U3.19 U3.25 U3.26 U3.27 U3.28 U3.29 U3.30 U3.31 U3.38 U3.39 U3.40 U3.41 U3.45 U3.46

## Polygon pours and split planes (outlines as drawn)
DC+_OUT on Top Layer "DC+_OUT_L01_P006" (solid, pour order 6): 1645,2920 1645,3300 1070,3300 1070,2922.63
GND on Top Layer "NONET_L-01_P-001" (solid, pour order 14): 20,1945 1950,1945 1950,15 20,15
DC- on Top Layer "DC-_L01_P013" (solid, pour order 13): 396.48,2295 1590,2295 1590,2065 1585,2060 1580,2065 396.48,2065
DC- on Top Layer "DC-_L01_P009" (solid, pour order 9): 1487.5,2615 1822.5,2615 1822.5,2065 1487.5,2065
DC- on Top Layer "DC-_L01_P008" (solid, pour order 8): 72.5,2615 407.5,2615 407.5,2065 72.5,2065
DC+_OUT on Top Layer "DC+_OUT_L01_P004" (solid, pour order 4): 1487.5,3470 1822.5,3470 1822.5,2920 1487.5,2920
DC+ on Top Layer "DC+_L01_P003" (solid, pour order 3): 940,2922.5 940,3300 340,3300 340,2927.86
DC+ on Top Layer "DC+_L01_P000" (solid, pour order 0): 75,3475 410,3475 410,2925 75,2925
DC+ on Bottom Layer "DC+_L02_P002" (solid, pour order 2): 940,2922.5 940,3300 340,3300 340,2927.86
GND on Bottom Layer "NONET_L-01_P-001" (solid, pour order 15): 20,1945 1950,1945 1950,15 20,15
DC- on Bottom Layer "DC-_L02_P012" (solid, pour order 12): 341.48,2295 1535,2295 1535,2065 1530,2060 1525,2065 341.48,2065
DC- on Bottom Layer "DC-_L02_P011" (solid, pour order 11): 1482.5,2615 1817.5,2615 1817.5,2065 1482.5,2065
DC- on Bottom Layer "DC-_L02_P010" (solid, pour order 10): 70,2615 410,2615 410,2065 70,2065
DC+_OUT on Bottom Layer "DC+_OUT_L02_P007" (solid, pour order 7): 1645,2920 1645,3300 1070,3300 1070,2922.63
DC+_OUT on Bottom Layer "DC+_OUT_L02_P005" (solid, pour order 5): 1487.5,3470 1822.5,3470 1822.5,2920 1487.5,2920
DC+ on Bottom Layer "DC+_L02_P001" (solid, pour order 1): 72.5,3475 407.5,3475 407.5,2925 72.5,2925
no net on Top Solder "NONET_L-01_P-001" (solid, pour order 16): 1070,3300 1485,3300 1485,3467.5 1487.5,3470 1822.5,3470 1822.5,2920 1072.63,2920 1070,2922.63
no net on Bottom Solder "NONET_L-01_P-001" (solid): 1070,3300 1485,3300 1485,3467.5 1487.5,3470 1822.5,3470 1822.5,2920 1072.63,2920 1070,2922.63

## Other copper
Top Layer:
  pour cut-out: 1005,2295 1375,2295 1375,2065 1005,2065

## Silkscreen, mask and mechanical layers (free items; w line width, h text height)
Top Overlay:
  text "DC+ IN" at 460,3445 h39.37
  text "DC+ OUT" at 1195,3445 h39.37
  text "DC-" at 155,2685 h39.37
  text "DC-" at 1565,2685 h39.37
  text "GND CANL CANH" at 340,1855 h23.62 r270
  text "+3.3 ADC1 GND" at 920,1755 h27.56
  text "+3.3 GND CTX CRX CANH CANL" at 210,1490 h23.62 r270
  text "SCL1 SDA1 +5 GND" at 1070,915 h27.56
  text "+3.3 DIO CLK GND" at 205,790 h23.62 r270
  text "0       1" at 1265,370 h27.56 r270
  text "1      0" at 1050,135 h27.56 r90
Bottom Overlay:
  text "GND +3.3 SDA2 SCL2" at 1050,1265 h27.56
Top Solder:
  region: 1375,2295 1490,2295 1490,2615 1825,2615 1825,2065 1375,2065
  region: 70,2615 410,2615 410,2295 1005,2295 1005,2065 70,2065
  region: 75,3470 410,3470 410,3295 940,3295 940,2920 75,2920
Bottom Solder:
  region: 70,3470 405,3470 405,3295 935,3295 935,2920 70,2920
  region: 75,2615 410,2615 410,2295 1485,2295 1485,2615 1825,2615 1825,2060 1820,2065 75,2065
Mechanical 1:
  lines w30: 175,1980 1175,1980 ; 1375,1980 1855,1980
  lines w39.37: 0,1.69 1970,1.69 1970,3545 0,3545 0,1.69